# Altium PCB regbot_v3.PcbDoc
Units mm, origin at the board's own origin, x right, y up, seen from the top; angles counter-clockwise.
Board outline 97.79 x 97.79 mm, 2 copper layers (Top Layer, Bottom Layer); 64 components, 82 nets, 378 pads, 83 vias.
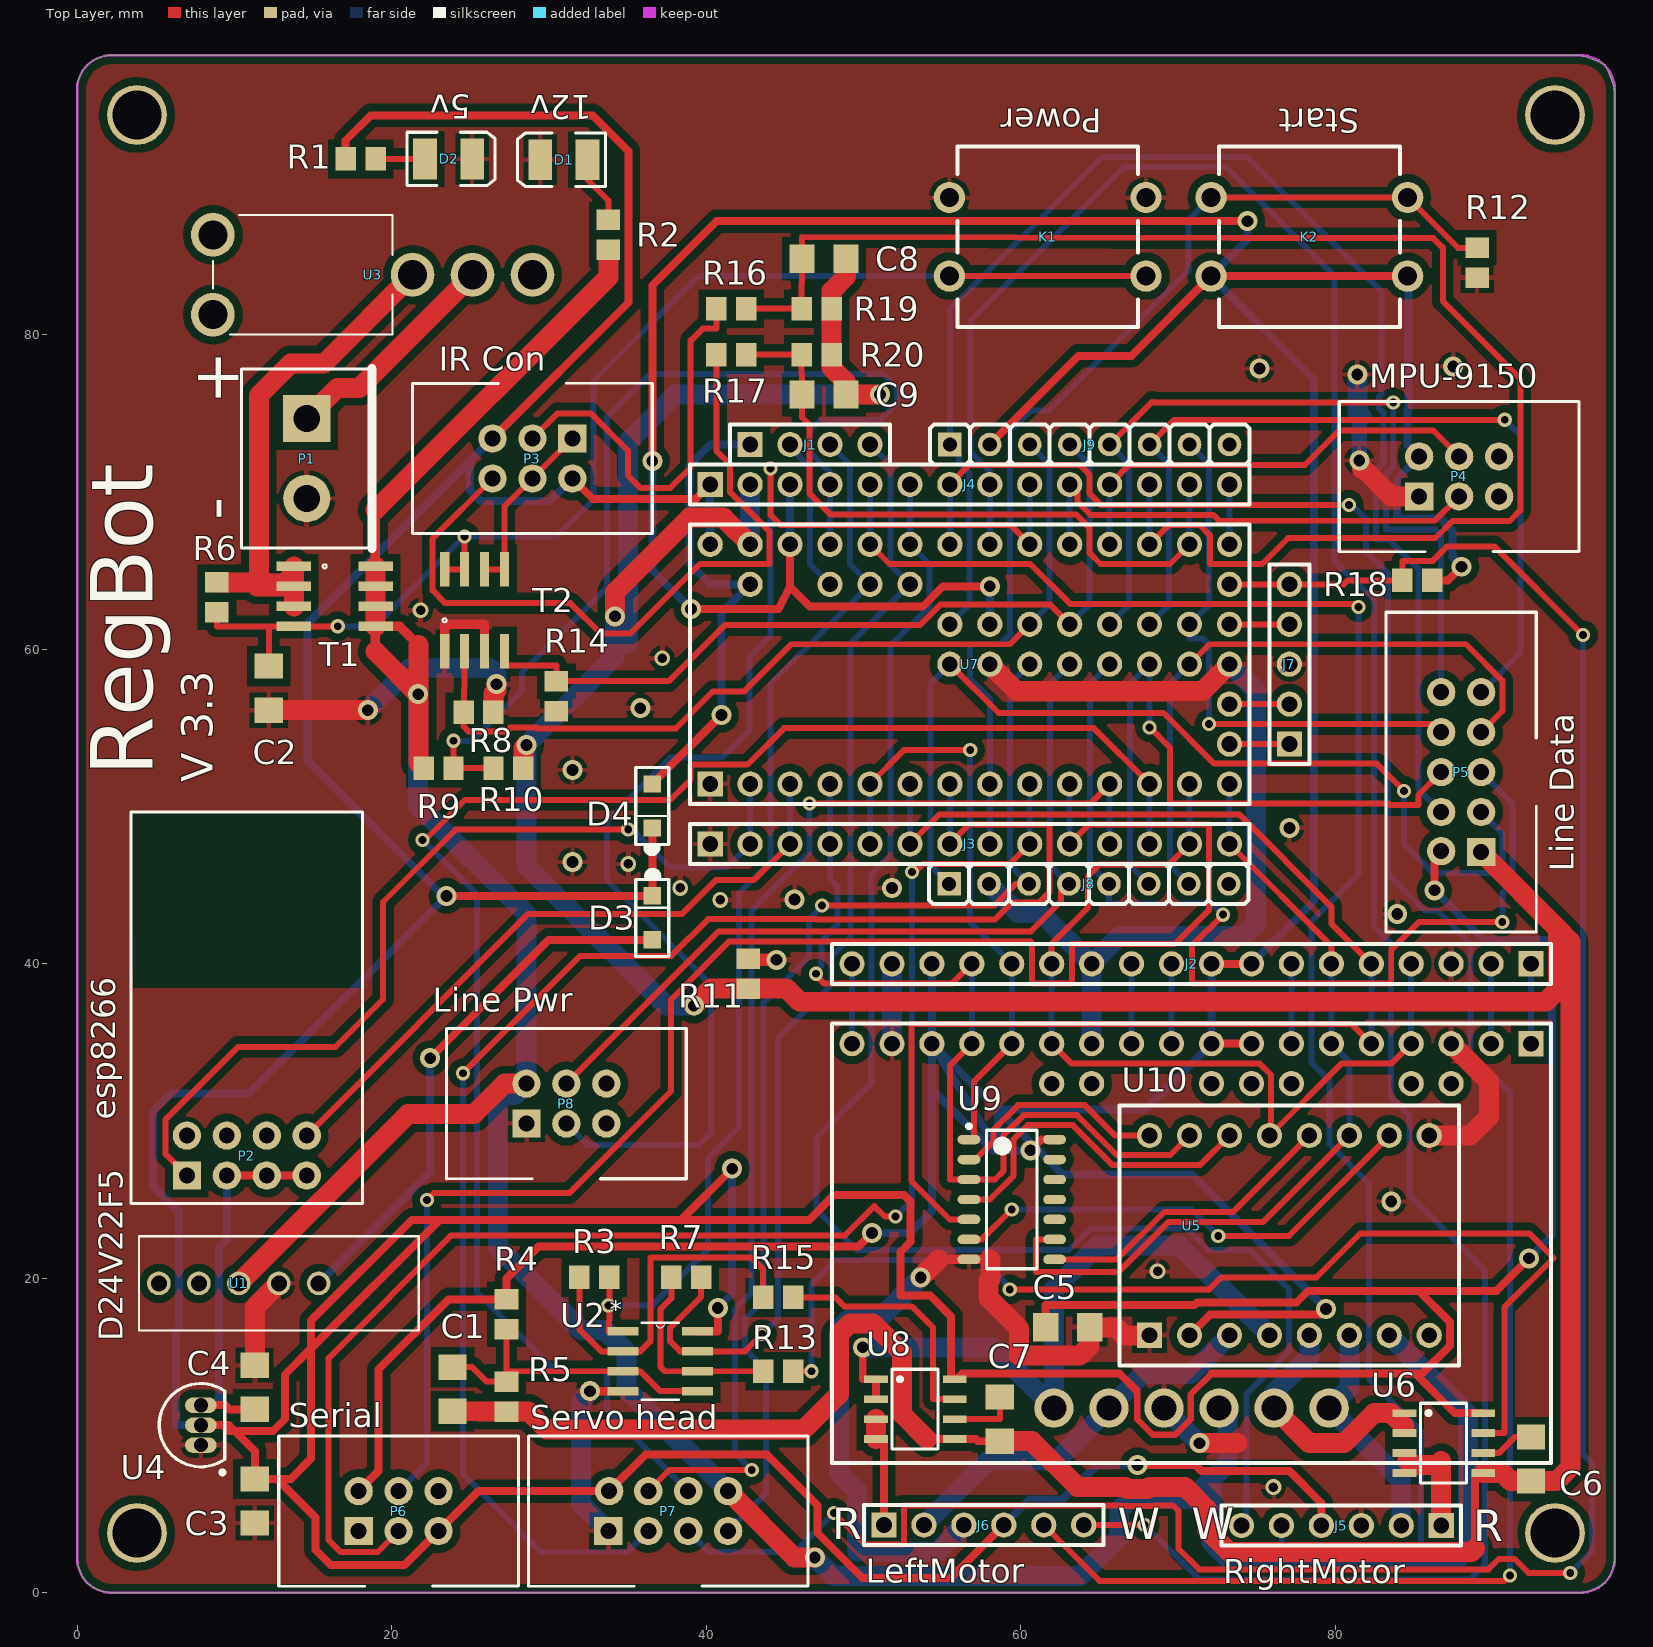
[diagram p0: Top Layer view]
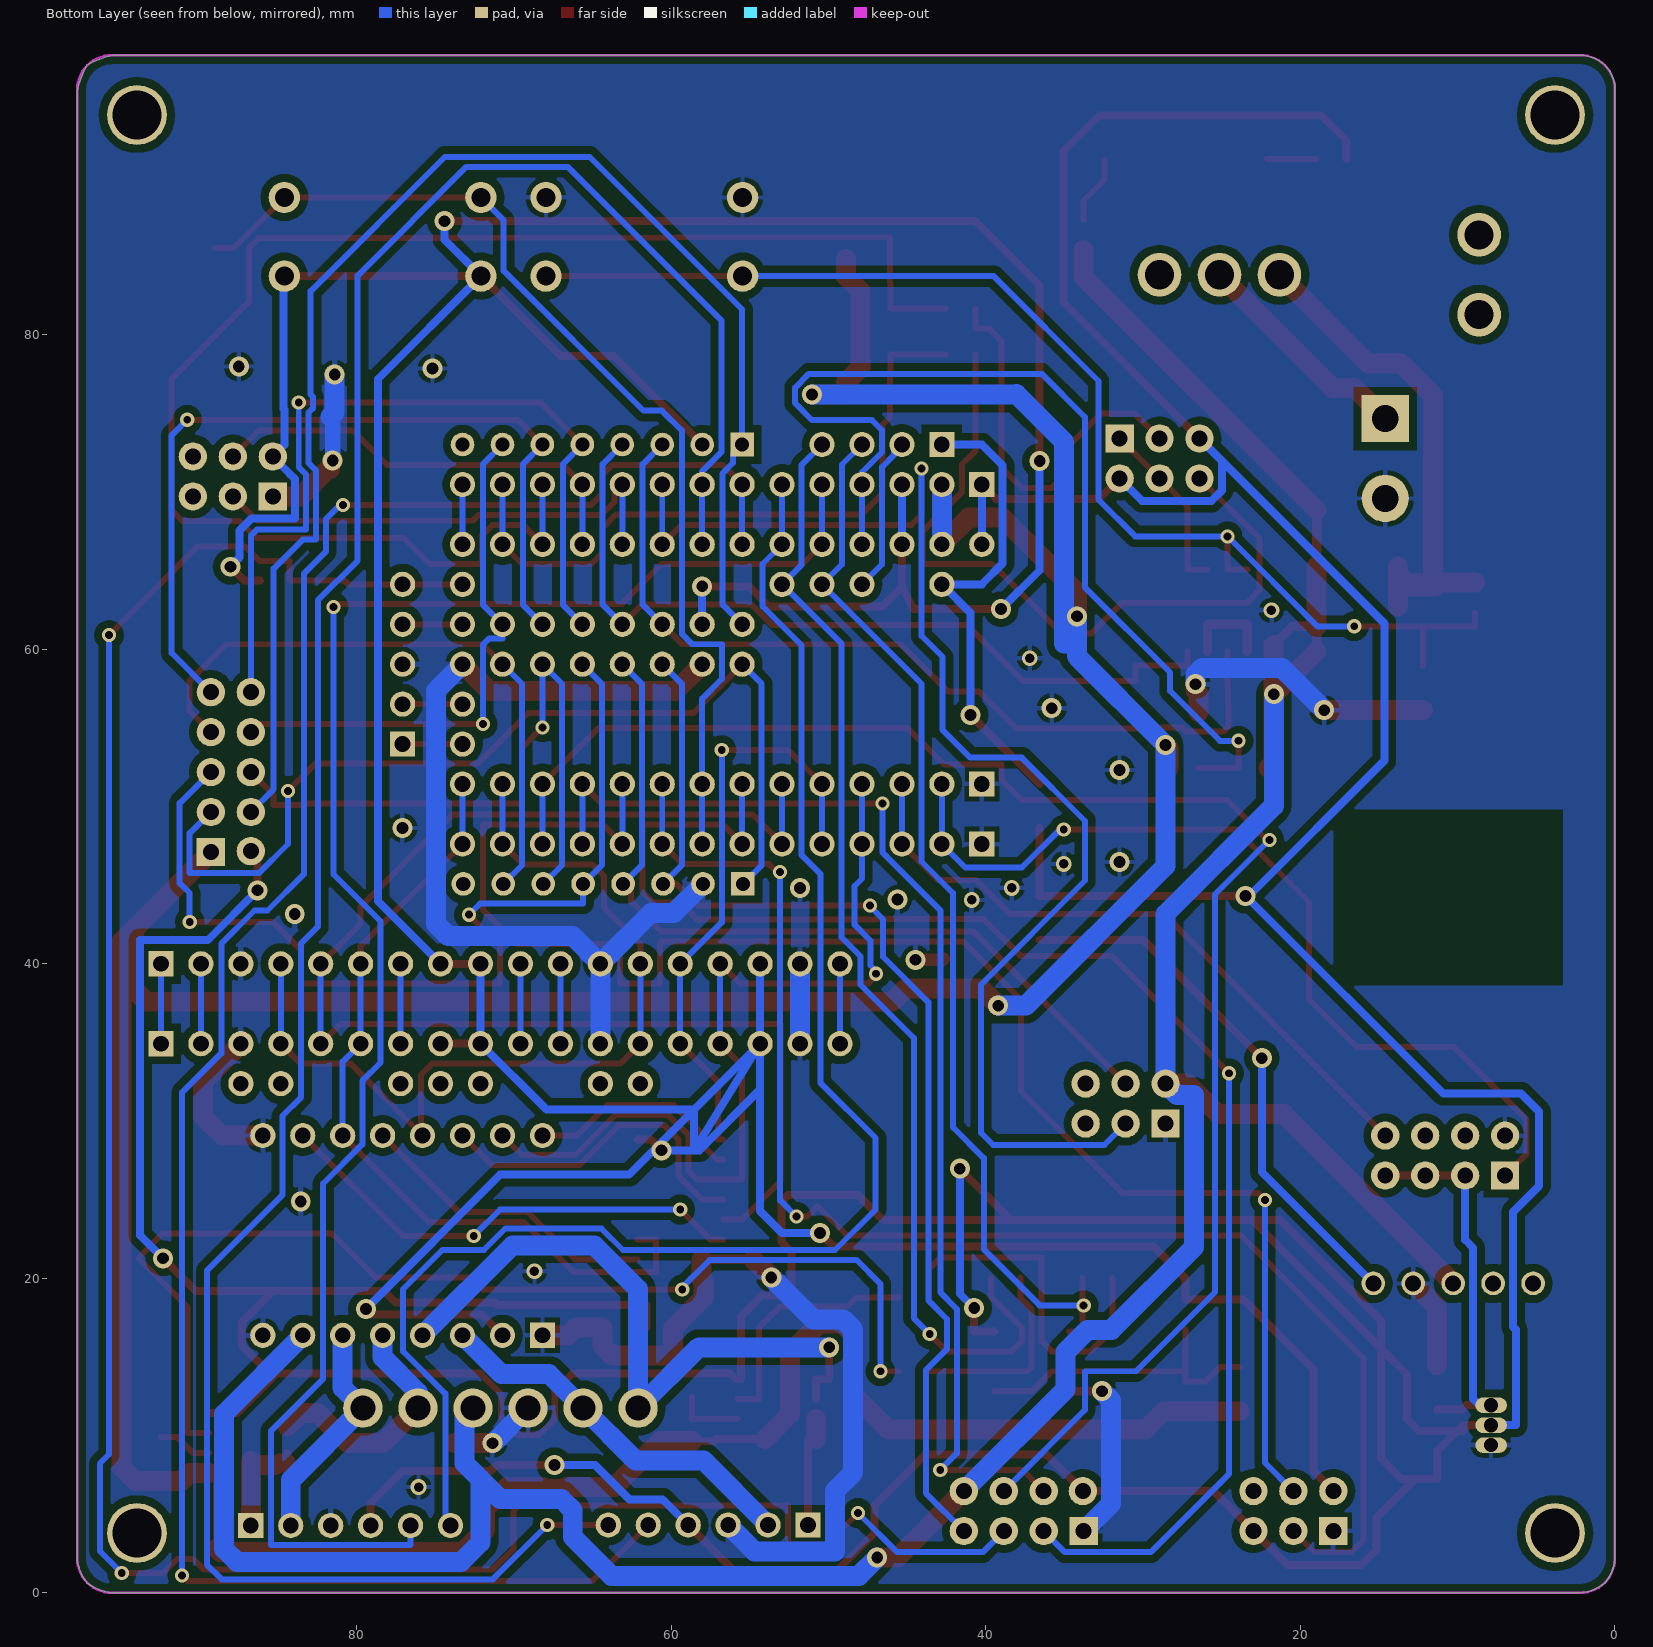
[diagram p1: Bottom Layer view, seen from below]

## Layer stack, top to bottom
Top Solder: solder mask 0.0102, Solder Resist, Dk 3.5
Top Layer: signal copper 0.0356
Dielectric1: dielectric 0.32, FR-4, Dk 4.8
Bottom Layer: signal copper 0.0356
Bottom Solder: solder mask 0.0102, Solder Resist, Dk 3.5

## Board outline
95.631,0 ccw(c94.922,3.913) 97.16,0.626 ccw(c94.403,2.654) 97.79,2.159 97.79,95.504 ccw(c91.471,94.051) 97.16,97.16 ccw(c93.874,91.006) 95.504,97.79 14.351,97.79 2.032,97.79 ccw(c2.672,94.348) 0.762,97.282 ccw(c2.22,95.601) 0,95.758 0,61.341 0,2.159 ccw(c2.979,2.481) 0.626,0.626 ccw(c2.545,3.2) 2.286,0

## Design rules (kind name [scope] priority, off if disabled: settings)
Clearance [All] p1: gap=0.254 except(0.5: Arc-Poly Track-Poly SMDPad-Poly THPad-Poly Via-Poly Fill-Poly Poly-Poly Poly-Region Poly-Text)
ComponentClearance ComponentClearance_motorController [HasFootprint('Pololu_Dual_MC33926') or HasFootprint('H01x14')] p1: gap=-5 collisioncheckmode=3 verticalgap=2540 showdistances=FALSE
ComponentClearance ComponentClearance_1 [All] p2: gap=0.254 collisioncheckmode=3 verticalgap=0.254 showdistances=FALSE
FabricationTestPointUsage TestPointUsage [All] p1: valid=0 allowmultiple=FALSE
FabricationTestpoint Testpoint [All] p1: side=3 testpointundercomponent=TRUE minsize=1.016 maxsize=2.54 preferedsize=1.524 minholesize=0 maxholesize=1.016 preferedholesize=0.813 testpointgrid=0.025 allowsidetop=TRUE allowsidebottom=TRUE usegrid=TRUE gridtolerance=0
HoleSize [All] p1: absolutevalues=TRUE maxlimit=4 minlimit=0.025 maxpercent=80.000 minpercent=20.000
MinimumSolderMaskSliver [HasFootprint('TO-92-TO3') vs HasFootprint('TO-92-TO3')] p1: minsoldermaskwidth=0.065
MinimumSolderMaskSliver MinimumSolderMaskSliver_1 [All] p2: minsoldermaskwidth=0.1
PolygonConnect [All] p1: connectstyle=Relief reliefconductorwidth=0.3 reliefentries=4 polygonreliefangle="90 Angle" airgapwidth=0.3
RoutingVias RoutingVias_power [(InNetClass('Power high') OR InNetClass('Power low'))] p1: holewidth=0.75 width=1.27 viastyle="Through Hole" minholewidth=0.6 minwidth=0.75 maxholewidth=1 maxwidth=2.54
RoutingVias [All] p2: holewidth=0.5 width=0.9 viastyle="Through Hole" minholewidth=0.3 minwidth=0.5 maxholewidth=0.711 maxwidth=1.27
SMDNeckDown [All] p1: percent=100.000
SilkToSilkClearance [All] p1: silktosilkclearance=0.1
SilkToSolderMaskClearance SilkscreenOverComponentPads [IsPad] p1: minsilkscreentomaskgap=0.1 clearancetoexposedcopper=TRUE
SolderMaskExpansion [All] p1: expansion=0.102
Width Width_pwr_high [InNetClass('Power high')] p1: maxlimit=2.54 minlimit=0.5 preferedwidth=1.27 minimp=50.000000 maximp=50.000000 favimp=50.000000
Width Width_pwr_low [InNetClass('Power low')] p2: maxlimit=1.016 minlimit=0.254 preferedwidth=0.508 minimp=50.000000 maximp=50.000000 favimp=50.000000
Width [All] p3: maxlimit=0.508 minlimit=0.254 preferedwidth=0.381 minimp=50.000000 maximp=50.000000 favimp=50.000000
23 further rules are at their usual default settings.

## Classes and differential pairs
net class "Power low": +3.3-WIFI +3.3V +5V NetD3_A VUSB
net class "Power high": AGND GND LEFTMOTOR+ LEFTMOTOR- LEFTMOTOROUT NetP1_1 NetR6_2 RIGHTMOTOR+ RIGHTMOTOR- RIGHTMOTOROUT VMOT

## Components (designator, comment, footprint, x,y, rotation, side; value= is the part's Value field where it differs from the comment)
C1 "1uF" C1206 23.876,12.954 r90 top
C2 "47uF, 25v" C1206 12.192,57.531 r270 top
C3 "1uF" C1206 11.303,5.845 r270 top
C4 "1uF" C1206 11.303,13.078 r90 top
C5 "1uF" C1206 62.992,16.891 r0 top
C6 "220nF" C1206 92.456,8.509 r270 top
C7 "220nF" C1206 58.674,11.049 r270 top
C8 "1nF" C1206 47.498,84.836 r0 top
C9 "1nF" C1206 47.498,76.2 r180 top
D1 "12v" 3.5X2.8X1.9 30.96,91.132 r180 top locked
D2 "5v" 3.5X2.8X1.9 23.622,91.186 r0 top
D3 "MPEG4020ER" SOD123W 36.576,42.926 r270 top
D4 "MPEG4020ER" SOD123W 36.576,50.038 r90 top
J1 "Teensy pin header top" H01x04 42.799,73.025 r90 top locked
J2 "Pololu pin header" H01x18 92.456,40.005 r270 top locked
J3 "Teensy pin header left" H01x14 40.259,47.625 r90 top locked
J4 "Teensy pin header right" H01x14 40.259,70.485 r90 top locked
J5 "RightMotor" H01x06 86.741,4.287 r270 top locked
J6 "LeftMotor" H01x06 51.308,4.318 r90 top
J7 "Teensy pin header end" H01x05 77.089,53.975 r180 top locked
J8 "Teensy pin header buttom left" H01x07 55.449,45.085 r90 top
J9 "Teensy pin header buttom right" H01x07 55.499,73.025 r90 top locked
K1 "Power" COM_10302 61.722,86.233 r0 top locked
K2 "Start" COM_10302 78.359,86.233 r0 top locked
P1 "Power" Rising_clamp_2 14.605,72.136 r270 top
P2 "esp8266" ESP8266 6.985,26.543 r90 top locked
P3 "IR Con" HOUSED6 31.496,73.406 r270 top locked
P4 "MPU-9150" HOUSED6 85.344,69.723 r90 top locked
P5 "Line Data" HOUSED10 89.281,47.117 r180 top locked
P6 "Serial" HOUSED6 17.907,3.937 r90 top
P7 "Servo head" HOUSED8 33.782,3.937 r90 top
P8 "Line Pwr" HOUSED6 28.575,29.845 r90 top
R1 "1k2" R0805 18.034,91.186 r180 top
R2 "4k7" R0805 33.782,86.36 r270 top
R3 "47K" R0805 32.893,20.066 r0 top
R4 "47k" R0805 27.305,17.714 r270 top
R5 "47k" R0805 27.305,12.481 r90 top
R6 "15K" R0805 8.89,63.307 r90 top
R7 "47K" R0805 38.735,20.066 r0 top
R8 "47K" R0805 25.527,56.007 r180 top
R9 "15k" R0805 22.987,52.451 r180 top
R10 "1k2" R0805 27.432,52.451 r180 top
R11 "0" R0805 42.672,39.37 r270 top
R12 "33k" R0805 89.027,84.582 r270 top
R13 "47k" R0805 44.577,14.097 r180 top
R14 "47K" R0805 30.48,57.023 r90 top
R15 "47k" R0805 44.577,18.796 r180 top
R16 "6k8" R0805 41.595,81.661 r0 top
R17 "6k8" R0805 41.595,78.74 r0 top
R18 "15k" R0805 85.217,64.389 r180 top
R19 "3k6" R0805 47.025,81.661 r0 top
R20 "3k6" R0805 47.025,78.74 r180 top
T1 "DMG4435" "SO8 - DMG4435" 16.383,63.373 r270 top
T2 "DMN2029" "SO8 - DMN2029" 25.273,62.484 r0 top
U1 "D24V22F5" D24V22Fx-vert 5.207,19.685 r0 top
U2 "MCP6242" SOIC127P600X175-8N 37.084,14.732 r0 top
U3 "SPDS Switch" RS-SPDS-ANGLE 21.336,83.82 r270 top
U4 "MCP1700" TO-92-TO3 7.874,10.668 r0 top
U5 "Pololu Dual MC33926" Pololu_Dual_MC33926 70.866,36.195 r270 top locked
U6 "ACS712" SOIC8 84.408,11.43 r0 top
U7 "TEENSY 3.1" TEENSY_3_1 40.259,51.435 r90 top locked
U8 "ACS712" SOIC8 50.8,13.589 r0 top
U9 "74LVT04" SO14 59.436,25.019 r0 top
U10 "TB6612FNG" Breakout16 77.089,22.733 r90 top

## Footprints (in the part's own frame and the unit in brackets; to place one, negate y for a bottom-side part, rotate by r counter-clockwise, add the part's x,y. Pads: shape width x height; smd on the part's side, far side on the other; paste and mask are expansions set on the pad)
3.5X2.8X1.9 [mm] "SM LED; 2 C-Bend Leads; Body 3.5 x 2.8 x 1.9 mm, inc leads (LxWxH typ)"
  rect 1.5x2.6 smd: 1(-1.5,0) 2(1.5,0)
  silkscreen extent -2.65,-1.7 2.95,1.7
Breakout16 [mm]
  rect 1.6x1.6 hole 1: 1(-6.35,8.89)
  round 1.6 hole 1: 1(-6.35,-8.89) 1(6.35,-8.89) 2(-6.35,6.35) 3(-6.35,3.81) 4(-6.35,1.27) 5(-6.35,-1.27) 6(-6.35,-3.81) 7(-6.35,-6.35) 10(6.35,-6.35) 11(6.35,-3.81) 12(6.35,-1.27) 13(6.35,1.27) 14(6.35,3.81) 15(6.35,6.35) 16(6.35,8.89)
  silkscreen extent -8.25,-10.79 8.25,10.79
C1206 [mm]
  rect 1.6x1.8 smd: 1(-1.4,0) 2(1.4,0)
COM_10302 [mm]
  round 2 hole 1.2: 1(-6.25,2.5) 1(6.25,2.5) 2(-6.25,-2.5) 2(6.25,-2.5)
  silkscreen extent -5.75,-5.75 5.75,5.75
D24V22Fx-vert [mm]
  round 1.5 hole 1.016: EN(2.54,0) GND(7.62,0) PG(0,0) Vin(5.08,0) Vout(10.16,0)
  silkscreen extent -1.27,-3 16.53,3
ESP8266 [mm]
  rect 1.8x1.8 hole 1: 1(0,0)
  round 1.8 hole 1: 2(0,-2.54) 3(0,-5.08) 4(0,-7.62) 5(2.54,-7.62) 6(2.54,-5.08) 7(2.54,-2.54) 8(2.54,0)
  silkscreen extent -1.78,-11.18 23.11,3.56
H01x04 [mm]
  rect 1.6x1.6 hole 1: 1(0,0)
  round 1.6 hole 1: 2(0,-2.54) 3(0,-5.08) 4(0,-7.62)
  silkscreen extent -1.27,-8.89 1.27,1.27
H01x05 [mm]
  rect 1.6x1.6 hole 1: 1(0,0)
  round 1.6 hole 1: 2(0,-2.54) 3(0,-5.08) 4(0,-7.62) 5(0,-10.16)
  silkscreen extent -1.27,-11.43 1.27,1.27
H01x06 [mm]
  rect 1.6x1.6 hole 1: 1(0,0)
  round 1.6 hole 1: 2(0,-2.54) 3(0,-5.08) 4(0,-7.62) 5(0,-10.16) 6(0,-12.7)
  silkscreen extent -1.27,-13.97 1.27,1.27
H01x07 [mm]
  rect 1.5x1.5 hole 0.9: 1(0,0)
  round 1.5 hole 0.9: 2(0,-2.54) 3(0,-5.08) 4(0,-7.62) 5(0,-10.16) 6(0,-12.7) 7(0,-15.24) 8(0,-17.78)
  silkscreen extent -1.27,-19.05 1.27,1.27
H01x14 [mm]
  rect 1.6x1.6 hole 1: 1(0,0)
  round 1.6 hole 1: 2(0,-2.54) 3(0,-5.08) 4(0,-7.62) 5(0,-10.16) 6(0,-12.7) 7(0,-15.24) 8(0,-17.78) 9(0,-20.32) 10(0,-22.86) 11(0,-25.4) 12(0,-27.94) 13(0,-30.48) 14(0,-33.02)
  silkscreen extent -1.27,-34.29 1.27,1.27
H01x18 [mm]
  rect 1.6x1.6 hole 1: 1(0,0)
  round 1.6 hole 1: 2(0,-2.54) 3(0,-5.08) 4(0,-7.62) 5(0,-10.16) 6(0,-12.7) 7(0,-15.24) 8(0,-17.78) 9(0,-20.32) 10(0,-22.86) 11(0,-25.4) 12(0,-27.94) 13(0,-30.48) 14(0,-33.02) 15(0,-35.56) 16(0,-38.1) 17(0,-40.64) 18(0,-43.18)
  silkscreen extent -1.27,-44.45 1.27,1.27
HOUSED6 [mm]
  rect 1.8x1.8 hole 1.02: 1(0,0)
  round 1.8 hole 1.02: 2(0,-2.54) 3(0,-5.08) 4(2.54,-5.08) 5(2.54,-2.54) 6(2.54,0)
  silkscreen extent -3.51,-10.16 6.05,5.08
HOUSED8 [mm]
  rect 1.8x1.8 hole 1.02: 1(0,0)
  round 1.8 hole 1.02: 2(0,-2.54) 3(0,-5.08) 4(0,-7.62) 5(2.54,-7.62) 6(2.54,-5.08) 7(2.54,-2.54) 8(2.54,-0.051)
  silkscreen extent -3.51,-12.7 6.05,5.08
HOUSED10 [mm]
  rect 1.8x1.8 hole 1.02: 1(0,0)
  round 1.8 hole 1.02: 2(0,-2.54) 3(0,-5.08) 4(0,-7.62) 5(0,-10.16) 6(2.54,-10.16) 7(2.54,-7.62) 8(2.54,-5.08) 9(2.54,-2.54) 10(2.54,-0.051)
  silkscreen extent -3.51,-15.24 6.05,5.08
Pololu_Dual_MC33926 [mm]
  rect 1.6x1.6 hole 1: 1(1.27,21.59)
  round 1.6 hole 1: 3(1.27,19.05) 5(1.27,16.51) 6(3.81,16.51) 7(1.27,13.97) 8(3.81,13.97) 9(1.27,11.43) 11(1.27,8.89) 13(1.27,6.35) 14(3.81,6.35) 15(1.27,3.81) 16(3.81,3.81) 17(1.27,1.27) 18(3.81,1.27) 19(1.27,-1.27) 21(1.27,-3.81) 23(1.27,-6.35) 24(3.81,-6.35) 25(1.27,-8.89) 26(3.81,-8.89) 27(1.27,-11.43) 29(1.27,-13.97) 31(1.27,-16.51) 33(1.27,-19.05) 35(1.27,-21.59)
  round 2.5 hole 1.6: 37(24.44,8.75) 38(24.44,5.25) 39(24.44,1.75) 40(24.44,-1.75) 41(24.44,-5.25) 42(24.44,-8.75)
  silkscreen extent 0,-22.86 27.94,22.86
R0805 [mm]
  rect 1.3x1.5 smd: 1(-0.95,0) 2(0.95,0)
Rising_clamp_2 [mm]
  rect 3x3 hole 1.7: 1(-2.54,0)
  round 3 hole 1.7: 2(2.54,0)
  silkscreen extent -5.7,-4.15 5.7,4.15
RS-SPDS-ANGLE [mm]
  round 2.775 hole 1.85: 0(-2.54,-12.7) 0(2.54,-12.7) 1(0,0) 2(0,3.81) 3(0,7.62)
  silkscreen extent -3.81,-12.7 3.81,-1.27
"SO8 - DMG4435" [mm] "Special pinout for the DMG4435"
  rect 0.6x2.2 smd: 1(-1.905,-2.6) 1(-0.635,-2.6) 1(0.635,-2.6) 2(1.905,-2.6) 3(-1.905,2.6) 3(-0.635,2.6) 3(0.635,2.6) 3(1.905,2.6)
  silkscreen extent -2.03,-0.76 -1.78,-0.51
"SO8 - DMN2029" [mm] "Special pinout for the DMN2029"
  rect 0.6x2.2 smd: 1(-1.905,-2.6) 2(-0.635,-2.6) 3(0.635,-2.6) 4(1.905,-2.6) 5(0.635,2.6) 5(1.905,2.6) 7(-1.905,2.6) 7(-0.635,2.6)
  silkscreen extent -2.03,-0.76 -1.78,-0.51
SO14 [mm] "SOIC, 14-Leads, Body 8,65x3,90mm, Pitch 1,27mm, IPC Medium Density"
  oval 1.45x0.6 smd: 1(-2.725,3.81) 2(-2.725,2.54) 3(-2.725,1.27) 4(-2.725,0) 5(-2.725,-1.27) 6(-2.725,-2.54) 7(-2.725,-3.81) 8(2.725,-3.81) 9(2.725,-2.54) 10(2.725,-1.27) 11(2.725,0) 12(2.725,1.27) 13(2.725,2.54) 14(2.725,3.81)
  silkscreen extent -2.85,-4.4 1.6,4.78, body extent -2,-4.4 2,4.4, height 1.75
SOD123W [mm]
  rect 1.1x1.1 smd: A(1.4,0) C(-1.4,0)
  silkscreen extent -2.89,-1.05 2.45,1.05
SOIC8 [mm]
  rect 1.5x0.5 smd: 1(0,0) 2(0,-1.27) 3(0,-2.54) 4(0,-3.81) 5(5,-3.81) 6(5,-2.54) 7(5,-1.27) 8(5,0)
  silkscreen extent 1.02,-4.44 3.94,0.64
SOIC127P600X175-8N [mil]
  rect 78x22 smd: 1(-93,75) 2(-93,25) 3(-93,-25) 4(-93,-75) 5(93,-75) 6(93,-25) 7(93,25) 8(93,75)
  silkscreen extent -46,-96 46,96
TEENSY_3_1 [mm]
  rect 1.6x1.6 hole 1: 1(0,0)
  round 1.6 hole 1: 2(0,-2.54) 3(0,-5.08) 4(0,-7.62) 5(0,-10.16) 6(0,-12.7) 7(0,-15.24) 8(0,-17.78) 9(0,-20.32) 10(0,-22.86) 11(0,-25.4) 12(0,-27.94) 13(0,-30.48) 14(0,-33.02) 15(2.54,-33.02) 16(5.08,-33.02) 17(7.62,-33.02) 18(10.16,-33.02) 19(12.7,-33.02) 20(15.24,-33.02) 21(15.24,-30.48) 22(15.24,-27.94) 23(15.24,-25.4) 24(15.24,-22.86) 25(15.24,-20.32) 26(15.24,-17.78) 27(15.24,-15.24) 28(15.24,-12.7) 29(15.24,-10.16) 30(15.24,-7.62) 31(15.24,-5.08) 32(15.24,-2.54) 33(15.24,0) 34(12.7,-2.54) 35(12.7,-7.62) 36(12.7,-10.16) 37(12.7,-12.7) 38(7.62,-15.24) 39(7.62,-17.78) 40(7.62,-20.32) 41(7.62,-22.86) 42(7.62,-25.4) 43(7.62,-27.94) 44(7.62,-30.48) 45(10.16,-30.48) 46(10.16,-27.94) 47(10.16,-25.4) 48(10.16,-22.86) 49(10.16,-20.32) 50(10.16,-17.78) 51(10.16,-15.24)
  silkscreen extent -1.27,-34.29 16.51,1.27
TO-92-TO3 [mm] "TO, Flat Index; 3 In-Line, Axial Leads; Body Dia. 4.8mm; Leads 0.56 x 0.53 mm (max)"
  oval 2x1 hole 0.9: 1(0,-1.27) 2(0,0) 3(0,1.27)
  silkscreen extent -2.65,-3.13 1.52,2.65, body extent -2.66,-2.66 1.52,2.66, height 5.33

## Part data
C1 C2 C3 C4 C5 C6 C7 C8 C9: library part C-EU, "CAPACITOR, European symbol"
D1 D2: library part LED3, "Red LED"
J1: library part H01x04
J2: library part H01x18
J3 J4: library part H01x14
J5 J6: library part H01x06
J7: library part H01x05
J8 J9: library part H01x07
K1 K2: library part COM-10302
P1: library part SCREW_CON_2X
P3 P4 P6 P8: library part PIN_HOUSED_6
P5: library part PIN_HOUSED_10
P7: library part PIN_HOUSED_8
R1 R2 R3 R4 R5 R6 R7 R8 R9 R10 R11 R12 R13 R14 R15 R16 R17 R18 R19 R20: library part R-EU, "RESISTOR, European symbol"
T1: library part DMG4435SSS, "P-Channel Enhancement MOSFET PNP"
T2: "Dual MOSFET NPN"
U1: library part D24V22Fx, "Pololu xV, 2.5A Step-Down Voltage Regulator"
U2: "MCP6242-E/SN"
U3: library part SPDS-ANGLE
U4: library part MCP1700-3302E/TO, "Low Quiescent Current LDO, 3-Pin TO-92, Extended TemperatureBAG"
U6 U8: library part ACS712ELCTR-05B-T, "ACS712ELCTR-05B-T"
U9: "Hex inverter"
U10: library part TB6612FNG_pololu, "Polulu #713 carrier board"

## Free pads (board coordinates)
  round 3.81 hole 3.1: 0(3.81,3.81) 1(3.81,93.98) 2(93.98,93.98) 3(93.98,3.81)

## Via types
v1: diameter 1.27, hole 0.75, Top Layer to Bottom Layer, 41 vias
v2: diameter 0.9, hole 0.5, Top Layer to Bottom Layer, 35 vias
v3: diameter 1, hole 0.6, Top Layer to Bottom Layer, 7 vias

## Nets (pads, with @x,y where several pads share a name; then routed paths per layer and width w, separated by ;. In a path a pad name is that pad's centre, name@x,y a point inside that pad or via, vN(x,y) a via of type N, cw(c..) or ccw(c..) an arc to the next point about the centre after c; other vN are vias at no path point)
+3.3-WIFI: C4.1 P2.2 P2.3 P2.4 U4.3 | length 24.3
  Top Layer w0.508: U4.3 9.449,11.938 9.709,11.678 C4.1 ; P2.2 P2.3 P2.4
  Bottom Layer w0.508: U4.3 8.611,11.938 9.017,12.344 9.017,21.946 9.525,22.454 P2.2
+3.3V: J2.8 J2.9 J2.16 J4.3 J9.2 K2.2 P4.6 P6.6 R4.1 R18.1 U5.15 U5.17 U5.31 U7.31 U7.50 U9.14 U10.2 | length 350.8
  Top Layer w0.508: P6.6 19.177,7.747 19.177,14.224 23.617,18.664 R4.1 27.305,19.99 29.35,22.034 49.695,22.034 v1(50.546,22.885) ; v1(36.576,71.984) 36.576,83.134 40.665,87.224 v1(74.422,87.224) ; v1(39.04,62.56) 44.602,62.56 45.339,63.983 ; U7.31 45.339,63.983 ; v1(58.039,64.008) 55.07,64.008 53.775,62.713 46.609,62.713 45.339,63.983 ; J9.2 63.678,78.664 67.04,78.664 72.109,83.733 K2.2@84.609,83.733 ; v1(60.63,28.143) 61.316,28.829 U9.14 ; U10.2 72.047,17.691 79.057,17.691 v1(79.426,18.059) ; U5.17 U5.15 ; J2.9 J2.8 ; R18.1 87.173,64.389 v1(88.036,65.253)
  Bottom Layer w0.508: v1(36.576,71.984) 36.576,65.024 v1(39.04,62.56) ; U7.31 J4.3 ; v1(50.546,22.885) 52.959,22.885 54.356,24.282 54.356,32.004 ; J2.16 U5.31 ; U7.50 v1(58.039,64.008) ; v1(60.63,28.143) 58.547,28.143 ; J2.9 U5.17 67.945,30.734 58.547,30.734 ; v1(74.422,87.224) 74.422,86.046 72.109,83.733 78.664,77.178 78.664,43.993 J2.8 ; v1(79.426,18.059) 70.891,26.594 62.687,26.594 58.547,30.734 ; K2.2@84.609,83.733 84.651,83.691 84.651,75.295 84.609,75.253 84.609,72.998 P4.6 85.344,72.241 84.264,71.162 84.264,71.131 84.234,71.131 83.936,70.833 83.936,69.321 83.936,68.315 86.701,68.315 87.452,67.564 87.452,65.837 v1(88.036,65.253) ; 54.356,32.004 U5.31 ; 54.356,32.004 58.217,28.143 58.547,28.143 ; U5.31 58.547,28.143 ; U5.31 58.547,30.734 ; 58.547,28.143 58.547,30.734
+5V: C3.1 C5.1 D3.C D4.C J4.1 J5.4 J6.4 P3.3 P3.6 P5.10 P6.3 P7.8 R1.2 U2.8 U4.2 U6.8 U7.33 U8.8 | length 474.7
  Top Layer w0.4: 67.366,12.873 67.412,12.827 67.412,11.049 68.41,10.051 69.822,10.051 70.82,11.049 70.82,12.629 72.136,13.945
  Top Layer w0.5: 55.575,17.577 55.575,13.589 U8.8 55.905,13.589 56.261,13.945 66.294,13.945 67.366,12.873 ; 72.136,13.945 84.963,13.945 ; 85.09,13.945 85.522,13.945
  Top Layer w0.508: U4.2 9.296,10.668 ; R1.2 17.084,92.37 18.669,93.955 32.791,93.955 35.052,91.694 35.052,82.042 P3.3 ; v1(23.492,44.326) D3.C D4.C ; P3.6 32.792,69.57 39.344,69.57 J4.1 ; U2.8 40.742,16.637 v1(40.742,18.11) ; v1(41.656,26.975) 38.405,23.724 ; 55.575,17.577 54.229,18.923 52.375,18.923 52.375,21.699 53.003,22.327 53.003,24.885 52.589,25.298 48.133,25.298 46.558,23.724 38.405,23.724 ; J6.4 55.575,0.965 49.935,0.965 47.098,3.802 47.098,5.556 43.866,8.788 36.144,8.788 P7.8 25.527,6.477 P6.3 20.828,1.778 16.129,1.778 15.165,2.742 15.165,4.799 12.719,7.245 ; C5.1 61.592,18.314 71.07,18.314 71.209,18.453 77.527,18.453 78.289,19.215 85.306,19.215 ; v1(67.437,8.128) 71.12,8.128 71.501,7.747 77.089,7.747 79.121,5.715 J5.4 ; 84.963,13.945 85.09,13.945 87.605,11.43 U6.8 ; 85.522,13.945 87.3,15.723 87.3,17.221 85.306,19.215 ; v1(86.309,44.679) 86.309,46.736 P5.10 ; v1(92.324,21.28) 90.259,19.215 85.306,19.215 ; 9.296,10.668 9.652,10.668 10.008,10.312 ; 9.296,10.668 9.652,10.312 10.008,10.312 ; 10.008,10.312 11.303,9.017 C3.1 12.719,7.245 ; 10.008,10.312 12.471,10.312 13.208,11.049 13.208,13.868 14.884,15.545 ; 12.719,7.245 13.589,7.245 14.884,8.54 14.884,15.545 ; 14.884,15.545 23.063,23.724 ; 14.884,15.545 14.884,17.323 21.285,23.724 23.063,23.724 ; 23.063,23.724 38.405,23.724
  Bottom Layer w0.508: U4.2 6.299,10.668 6.299,16.739 6.477,16.916 6.477,24.232 4.826,25.883 4.826,30.607 5.969,31.75 10.916,31.75 v1@23.375,44.209 ; v1(23.492,44.326) v1@23.375,44.209 ; P3.3 24.994,71.984 ; P3.6 30.074,69.444 25.654,69.444 24.994,70.104 24.994,71.984 ; U7.33 J4.1 ; v1(40.742,18.11) 41.656,19.025 v1(41.656,26.975) ; J6.4 60.554,5.944 62.662,5.944 64.846,8.128 v1(67.437,8.128) ; v1(86.309,44.679) 89.484,41.504 93.777,41.504 93.777,22.733 v1(92.324,21.28) ; v1@23.375,44.209 14.656,52.928 14.656,61.646 24.994,71.984
A1: J7.5 P7.3 R18.2 U7.19 | length 151.8
  Top Layer w0.381: v2(48.133,5.08) 50.14,3.073 52.578,3.073 52.578,5.563 66.32,5.563 66.359,5.524 68.515,5.524 68.554,5.563 69.698,5.563 70.053,5.207 70.053,2.794 71.349,1.499 89.742,1.499 90.403,2.159 91.415,2.159 92.304,1.27 v2(94.945,1.27) ; U7.19 J7.5 80.543,64.135 80.797,64.389 R18.2 84.267,65.608 86.178,65.608 87.122,66.553 90.115,66.553 v2(95.758,60.909)
  Bottom Layer w0.381: P7.3 40.208,2.591 45.644,2.591 v2(48.133,5.08) ; v2(94.945,1.27) 96.342,2.667 96.342,8.23 95.758,8.814 v2(95.758,60.909)
A12: J8.1 P5.2 U7.38 | length 62
  Top Layer w0.381: U7.38 58.598,55.956 69.088,55.956 72.314,52.73 82.652,52.73 v2(84.379,51.003)
  Bottom Layer w0.381: J8.1 54.254,46.28 54.254,57.81 U7.38 ; v2(84.379,51.003) 84.379,47.625 86.233,45.771 90.626,45.771 90.626,48.312 P5.2
A13: J9.1 P5.9 U7.51 | length 91.7
  Bottom Layer w0.381: U7.51 56.744,62.84 56.744,71.195 56.088,71.851 56.088,72.436 J9.1 55.499,81.61 65.202,91.313 74.397,91.313 82.931,82.779 82.931,76.195 82.798,76.063 82.798,75.321 83.058,75.062 83.058,71.841 82.602,71.386 82.602,71.093 82.602,66.981 83.439,66.981 85.285,65.135 85.285,51.113 P5.9
A15: J8.5 P5.3 U7.42 | length 62.2
  Top Layer w0.381: v2(72.873,43.129) 70.891,41.148 70.891,38.761 83.541,38.761 83.566,38.786 83.566,40.894 85.344,42.672 v2(90.627,42.672)
  Bottom Layer w0.381: U7.42 64.414,57.81 64.414,46.28 J8.5 65.609,43.84 72.161,43.84 v2(72.873,43.129) ; P5.3 91.261,50.217 91.261,45.137 90.627,44.504 v2(90.627,42.672)
A16: J8.6 P5.8 U7.43 | length 42.9
  Top Layer w0.381: v2(68.199,55.042) 69.494,53.746 69.494,50.19 83.397,50.19 83.496,50.091 85.285,50.091 85.285,50.741 P5.8
  Bottom Layer w0.381: J8.6 66.954,46.28 66.954,57.81 U7.43 v2(68.199,55.042)
A17: J8.7 P5.4 U7.44 | length 40.2
  Top Layer w0.381: U7.44 72.009,60.325 88.316,60.325 90.627,58.014 90.627,56.083 P5.4
  Bottom Layer w0.381: J8.7 69.494,46.28 69.494,57.81 U7.44
A18: J9.7 P5.7 U7.45 | length 34.8
  Top Layer w0.381: v2(71.984,55.245) 86.233,55.245 P5.7
  Bottom Layer w0.381: J9.7 71.984,71.78 71.984,62.84 U7.45 70.739,60.681 71.603,60.681 71.984,60.3 v2(71.984,55.245)
A19: J9.6 P5.5 U7.46 | length 54.5
  Top Layer w0.381: J9.6 69.774,74.6 v2(90.78,74.6)
  Bottom Layer w0.381: U7.46 69.444,62.84 69.444,71.78 J9.6 ; P5.5 91.77,59.766 91.77,73.609 v2(90.78,74.6)
A20: J9.5 P5.6 U7.47 | length 53.5
  Top Layer w0.381: J9.5 68.377,75.743 68.428,75.692 v2(83.693,75.692)
  Bottom Layer w0.381: U7.47 66.904,62.84 66.904,71.78 J9.5 ; v2(83.693,75.692) 83.693,71.578 83.237,71.123 83.237,69.61 83.237,67.616 86.357,67.616 86.741,67.232 P5.6
AGND: C1.1 C6.2 C7.2 C8.2 C9.1 J4.2 P5.1 R5.1 R10.1 R11.2 R19.2 R20.1 U6.5 U7.32 U8.5 | length 285.9
  Top Layer w0.5: 54.051,9.779 U8.5 57.15,9.779 57.28,9.649 C7.2 ; 88.9,2.819 88.9,7.62 U6.5
  Top Layer w1.27: C1.1 25.578,11.554 25.601,11.531 R5.1 28.702,11.531 29.844,10.389 46.202,10.389 48.438,12.624 48.438,16.434 49.149,17.145 50.597,17.145 52.451,15.291 52.451,11.379 54.051,9.779 ; R10.1 28.382,53.731 v1(28.575,53.924) ; v1(34.214,62.103) 34.214,63.652 38.938,68.377 41.097,68.377 U7.32 ; v1(39.218,37.341) 40.297,38.42 R11.2 45.125,38.42 45.953,37.592 93.396,37.592 94.158,38.354 94.158,42.24 ; C8.2 48.898,83.702 47.975,82.779 R19.2 R20.1 47.975,77.911 48.898,76.987 C9.1 v1(51.054,76.2) ; C7.2 60.709,9.649 63.627,6.731 66.679,6.731 66.806,6.604 68.068,6.604 68.195,6.731 70.46,6.731 71.857,5.334 71.857,4.013 73.279,2.591 88.671,2.591 88.9,2.819 ; P5.1 94.158,42.24 ; U6.5 90.653,7.62 91.164,7.109 C6.2 94.079,7.109 94.971,8.001 94.971,41.427 94.158,42.24
  Bottom Layer w1.27: v1(34.214,62.103) 34.214,60.379 ; v1(39.218,37.341) 37.462,37.341 28.575,46.228 v1(28.575,53.924) 34.214,59.563 34.214,60.379 ; U7.32 J4.2 ; v1(51.054,76.2) 38.08,76.2 38.055,76.225 35.03,73.2 35.03,60.379 34.214,60.379
CLK: J4.14 U7.20 | length 3.8
  Bottom Layer w0.381: U7.20 J4.14
D1: J8.3 P7.4 U7.40 | length 72
  Top Layer w0.381: v2(47.371,43.706) 58.344,43.706 ; 58.344,43.739 59.69,45.085 J8.3
  Bottom Layer w0.381: P7.4 43.815,6.35 43.815,14.162 42.479,15.498 42.479,17.42 43.663,18.604 43.663,37.567 46.533,40.437 46.533,42.824 47.371,43.663 v2(47.371,43.706) ; J8.3 59.334,46.28 59.334,57.81 U7.40
DISABLE2: J2.4 J2.13 J3.13 U5.7 U5.25 U7.13 U10.13 | length 58
  Top Layer w0.381: U5.25 63.221,33.68 75.184,33.68 75.921,32.944 U10.13@75.921,29.185 ; J2.13 61.976,41.273 64.287,43.584 64.287,45.593 65.024,46.33 69.444,46.33 J3.13 ; U5.7 83.566,33.655 80.391,33.655 U10.13@75.921,29.185 ; U10.13@75.921,29.185 U10.13 75.921,29.083 U10.13@75.921,29.185
  Bottom Layer w0.381: U5.25 J2.13 ; J3.13 U7.13 ; U5.7 J2.4
DIST1: C8.1 J4.12 R16.2 R19.1 U7.22 | length 99.3
  Top Layer w0.381: R16.2 R19.1 46.075,83.236 46.098,83.259 C8.1 46.098,86.233 73.432,86.142 86.247,86.142 86.843,85.547 86.843,82.144 91.77,77.216 91.77,68.834 91.084,68.148 87.448,68.148 86.381,67.081 77.013,67.081 75.362,65.43 72.034,65.43 72.034,67.259 71.374,67.919 69.443,67.919 U7.22
  Bottom Layer w0.381: U7.22 J4.12
DIST2: C9.2 J4.13 R17.2 R20.2 U7.21 | length 43.8
  Top Layer w0.381: R17.2 R20.2 46.075,77.468 46.098,77.445 C9.2 46.098,74.755 46.584,74.27 46.584,69.901 47.904,68.58 63.516,68.58 64.364,67.733 64.364,66.142 65.075,65.431 69.495,65.431 U7.21
  Bottom Layer w0.381: U7.21 J4.13
GND: C2.2 C3.2 C4.2 C5.2 D1.2 D2.2 J2.3 J2.12 J2.17 J3.1 J5.3 J6.3 J7.3 J8.2 K1.1 P1.2 P2.8 P4.1 P6.1 P7.1 P8.1 R8.1 R11.1 R12.2 R14.1 T2.1 T2.3 U1.GND U2.4 U4.1 U5.5 U5.23 U5.33 U5.40 U7.1 U7.17 U7.39 U9.7 U10.1 | length 184.2
  Top Layer w0.559: v1(32.614,12.827) U2.4
  Top Layer w0.6: T2.1 23.368,61.595 25.908,61.595 T2.3 ; 54.788,21.209 U9.7 58.039,21.209
  Top Layer w0.8: R11.1 42.767,40.225 42.801,40.259 v1(44.473,40.259) ; 73.787,9.525 73.914,9.398
  Top Layer w1.27: C4.2 11.303,18.161 U1.GND ; C2.2 v1(18.488,56.131) ; R8.1 26.477,57.186 26.67,57.379 v1(26.67,57.785) ; v1(53.645,20.066) 54.788,21.209 ; 58.039,21.209 58.071,21.177 58.071,19.96 57.97,19.859 57.97,18.749 59.893,16.826 59.893,15.088 63.754,15.088 64.392,15.726 C5.2 66.04,16.891 66.548,16.383 U10.1@68.199,16.383 ; U7.39 59.741,57.353 71.577,57.353 U7.17 ; v1(71.374,9.525) 73.787,9.525 ; v1@81.7,71.462 81.827,71.462 83.566,69.723 P4.1 ; U10.1@85.979,29.083 88.57,29.083 89.789,30.302 89.789,32.512 U5.5
  Bottom Layer w1: v1(81.534,72.009) 81.534,74.676 81.661,74.803
  Bottom Layer w1.27: v1(18.488,56.131) 21.184,58.826 26.238,58.826 26.67,58.395 v1(26.67,57.785) ; v1(32.614,12.827) 32.029,12.243 32.029,5.69 P7.1 ; U5.33 J2.17 ; v1(53.645,20.066) 50.978,17.399 49.073,17.399 48.438,16.764 48.438,7.645 49.606,6.477 49.606,2.629 54.699,2.629 J6.3 ; J8.2 59.843,43.231 61.29,43.231 J2.12 ; U5.23 J2.12 ; U5.40 71.346,9.525 v1(71.374,9.525) ; U7.17 74.981,57.353 74.981,42.546 74.217,41.782 66.293,41.782 J2.12 ; v1(81.407,77.47) 81.407,75.057 81.661,74.803
  other v1: 83.566,24.892 83.947,43.18 45.616,44.092 51.816,44.831 31.496,46.482 77.089,48.641 31.496,52.324 35.814,56.261 75.184,77.851 87.503,77.978
  other v3: 76.073,6.731 68.707,20.447 40.894,44.069 38.354,44.831 35.052,46.355 37.211,59.436 21.844,62.484
LED: J4.9 P8.2 U7.25 | length 85.3
  Top Layer w0.381: v2(44.094,71.501) 44.094,68.555 44.729,67.92 59.334,67.92 U7.25
  Bottom Layer w0.381: P8.2 32.461,28.499 39.548,28.499 40.31,29.261 40.31,38.684 33.695,45.299 33.695,49.088 37.719,53.111 40.996,53.111 42.748,54.864 42.748,59.512 44.094,60.858 v2(44.094,71.501) ; U7.25 J4.9
LEDHIGH: J8.4 P8.5 U7.41 | length 52.6
  Top Layer w0.381: P8.5 40.794,42.064 60.657,42.064 62.566,43.972 62.566,44.582 J8.4
  Bottom Layer w0.381: J8.4 61.874,46.28 61.874,57.81 U7.41
LEFTDIR: J2.15 J3.4 U5.29 U7.4 U9.3 U10.15 | length 57.7
  Top Layer w0.381: v2(46.99,39.37) 46.99,39.243 47.472,38.761 55.652,38.761 J2.15 ; U5.29 55.499,33.528 55.499,26.289 U9.3 58.369,26.289 58.903,26.822 58.903,29.092 60.189,30.378 63.585,30.378 66.125,27.839 69.495,27.839 U10.15
  Bottom Layer w0.381: v2(46.99,39.37) 46.99,39.548 47.338,39.896 47.338,41.471 48.348,42.481 48.348,44.952 47.879,45.421 J3.4 U7.4 ; U5.29 J2.15
LEFTENCA: J4.7 J6.5 U7.27 | length 135.6
  Top Layer w0.381: J4.7 56.744,71.73 63.754,71.73 64.389,71.095 64.389,69.901 65.1,69.189 v2(80.873,69.189) ; J6.5 65.018,0.768 90.76,0.768 v2(91.11,1.118)
  Bottom Layer w0.381: U7.27 J4.7 ; v2@80.962,69.278 81.967,68.274 81.967,66.207 83.364,64.81 83.364,45.706 85.679,43.392 86.504,43.392 88.621,41.275 88.621,34.315 91.11,31.826 v2(91.11,1.118)
LEFTENCB: J4.8 J6.6 U7.26 | length 158.1
  Top Layer w0.381: J6.6 v2(67.894,4.318)
  Bottom Layer w0.381: U7.26 J4.8 58.039,71.323 56.82,72.542 56.82,80.922 66.576,90.678 73.041,90.678 79.954,83.765 79.954,65.636 82.474,63.116 82.474,42.367 83.541,41.3 83.541,31.521 84.734,30.328 84.734,25.298 89.535,20.498 89.535,1.803 88.595,0.864 71.349,0.864 v2(67.894,4.318)
LEFTFB: J2.10 U5.19 | length 5.1
  Bottom Layer w0.381: U5.19 J2.10
LEFTMOTCURR: J1.3 R3.2 U2.1 U7.36 | length 68.7
  Top Layer w0.381: v2(33.782,18.288) v2@33.843,18.288 ; R3.2 v2@33.843,18.288 ; U2.1 33.782,16.637 33.787,16.702 33.843,17.516 v2@33.843,18.288
  Bottom Layer w0.381: v2(33.782,18.288) 36.576,18.288 40.132,21.844 40.132,27.646 42.088,29.602 42.088,44.501 44.094,46.507 44.094,57.81 U7.36 49.149,65.405 49.149,71.755 J1.3
LEFTMOTCURRRAW: R3.1 R15.2 U2.2 | length 23.3
  Top Layer w0.381: R3.1 31.943,16.764 33.34,15.367 U2.2 35.814,15.367 36.449,16.002 36.449,21.336 42.865,21.336 43.627,20.574 R15.2
LEFTMOTOR+: J6.1 U8.3 U8.4 | length 7.2
  Top Layer w0.5: U8.4 51.308,9.779 J6.1
  Top Layer w1.27: U8.4 U8.3
LEFTMOTOR-: J6.2 U5.41 U10.3 | length 24.4
  Bottom Layer w1.27: J6.2 57.963,8.433 62.294,8.433 U5.41 67.78,13.919 70.815,13.919 U10.3
LEFTMOTOROUT: U5.42 U8.1 U8.2 U10.4 | length 42.7
  Top Layer w0.5: v1(49.962,15.621) 49.962,13.589 U8.1 U8.2
  Bottom Layer w1.27: v1(49.962,15.621) 58.25,15.621 U5.42 62.116,19.317 64.897,22.098 70.104,22.098 U10.4
LEFTPWM: J2.14 J3.5 U5.27 U7.5 U9.1 | length 38.3
  Top Layer w0.381: U7.5 52.578,53.594 v2(56.794,53.594) ; U9.1 57.023,28.829 57.023,32.512 U5.27
  Bottom Layer w0.381: J3.5 U7.5 ; v2(56.794,53.594) 56.794,42.647 J2.14 U5.27
NetC1_2: C1.2 R4.2 R5.2 U2.3 U2.5 | length 19.8
  Top Layer w0.381: C1.2 25.121,14.354 26.044,13.431 R5.2 27.305,14.097 ; R4.2 27.305,14.097 ; U2.5 37.084,12.827 35.814,14.097 U2.3 27.305,14.097
NetC2_1: C2.1 K1.2 R6.1 T1.2 T2.7 | length 79.5
  Top Layer w0.381: R6.1 8.89,61.468 12.192,61.468 ; C2.1 12.192,61.468 ; v2(16.579,61.468) T1.2 12.192,61.468 ; T2.7@23.368,65.084 24.638,65.084 v2(24.638,67.183) ; K1.2@55.472,83.733 K1.2@67.972,83.733
  Bottom Layer w0.381: v2(16.579,61.468) 18.923,61.468 v2(24.638,67.183) 30.505,67.183 32.842,69.52 32.842,77.064 39.512,83.733 K1.2@55.472,83.733
NetC6_1: C6.1 U6.6 | length 3.5
  Top Layer w0.381: U6.6 90.399,8.89 91.418,9.909 C6.1
NetC7_1: C7.1 U8.6 | length 4.3
  Top Layer w0.381: U8.6 58.674,11.049 C7.1
NetD1_1: D1.1 R2.1 | length 4.4
  Top Layer w0.381: D1.1 32.46,89.866 33.782,88.544 R2.1
NetD2_1: D2.1 R1.1 | length 3.1
  Top Layer w0.381: R1.1 D2.1
NetD3_A: D3.A U1.Vout | length 34.5
  Top Layer w0.508: v1(22.454,34.004) 29.975,41.526 D3.A
  Bottom Layer w0.508: U1.Vout 22.454,26.772 v1(22.454,34.004)
NetJ1_2: J1.2 U7.35 | length 9.9
  Bottom Layer w0.381: J1.2 45.832,72.532 45.832,72.367 46.609,71.59 46.609,65.405 U7.35
NetJ2_2: J2.2 U5.3 | length 5.1
  Bottom Layer w0.381: U5.3 J2.2
NetJ2_7: J2.7 U5.13 | length 5.1
  Bottom Layer w0.381: U5.13 J2.7
NetJ2_11: J2.11 U5.21 | length 5.1
  Bottom Layer w0.381: U5.21 J2.11
NetJ2_18: J2.18 U5.35 | length 5.1
  Bottom Layer w0.381: U5.35 J2.18
NetJ7_1: J7.1 U7.15 | length 3.8
  Top Layer w0.381: U7.15 J7.1
NetJ7_2: J7.2 U7.16 | length 3.8
  Top Layer w0.381: U7.16 J7.2
NetJ7_4: J7.4 U7.18 | length 3.8
  Top Layer w0.381: U7.18 J7.4
NetP1_1: P1.1 U3.2 | length 14.3
  Top Layer w1.27: P1.1 16.561,76.632 17.958,76.632 U3.2
NetP3_1: P3.1 P3.5 T2.5 | length 11.4
  Top Layer w0.381: T2.5@25.908,65.084 27.178,65.084 27.178,69.088 P3.5 P3.1
NetP3_2: P3.2 R16.1 | length 25.4
  Top Layer w0.381: P3.2 30.556,75.006 32.664,75.006 35.027,72.644 35.027,71.056 35.814,70.269 37.719,70.269 39.014,71.564 39.014,79.629 39.776,80.391 40.645,80.391 R16.1
NetP3_4: P3.4 R17.1 | length 47.8
  Top Layer w0.381: P3.4 22.606,67.056 22.606,63.754 23.419,62.941 31.369,62.941 33.299,61.011 35.179,61.011 39.599,65.43 44.044,65.43 44.044,67.48 41.529,69.995 41.529,71.755 40.645,72.639 R17.1
NetR6_2: R6.2 T1.1 U3.1 | length 34.7
  Top Layer w0.6: 11.557,64.516 13.021,64.516 T1.1@13.783,65.278
  Top Layer w1.27: R6.2 11.201,64.257 11.45,64.008 T1.1@13.783,64.008 ; 11.557,64.516 11.557,76.149 13.589,78.181 15.697,78.181 U3.1 ; T1.1@13.783,62.738 T1.1@13.783,64.008 ; T1.1@13.783,65.278 T1.1@13.783,64.008
NetR13_1: R13.1 U6.7 | length 71.3
  Top Layer w0.381: R13.1 v2(46.711,14.097) ; v2(59.309,19.304) 71.933,19.304 71.958,19.279 72.746,20.066 78.816,20.066 81.61,22.86 92.329,22.86 93.891,21.298 90.754,18.161 90.754,10.16 U6.7
  Bottom Layer w0.381: v2(46.711,14.097) 46.711,19.66 48.222,21.171 57.569,21.171 v2@59.372,19.367
NetR15_1: R15.1 U8.7 | length 15.6
  Top Layer w0.381: R15.1 48.222,18.796 48.793,18.224 53.073,18.224 54.432,16.866 54.432,12.319 U8.7
NetU9_2: U9.2 U10.16 | length 14.1
  Top Layer w0.381: U9.2 57.125,27.559 58.268,28.702 58.268,29.439 59.842,31.013 64.084,31.013 66.015,29.083 U10.16
NetU9_4: U9.4 U10.14 | length 21.7
  Top Layer w0.381: U9.4 58.039,25.019 59.55,26.53 59.55,28.842 60.452,29.743 63.322,29.743 65.862,27.204 71.4,27.204 U10.14
NetU9_6: U9.6 U10.10 | length 30.9
  Top Layer w0.381: U9.6 57.531,22.479 v2(59.436,24.384) ; v2(72.568,22.708) 77.064,22.708 U10.10
  Bottom Layer w0.381: v2(59.436,24.384) 70.891,24.384 v2(72.568,22.708)
NetU9_8: U9.8 U10.12 | length 19.5
  Top Layer w0.381: U9.8 66.123,21.209 69.151,24.237 73.513,24.237 U10.12
PWM1: J3.7 P7.2 U7.7 | length 96.9
  Top Layer w0.381: v2(24.536,33.045) 32.004,40.513 37.795,40.513 40.126,42.844 46.968,42.844 47,42.812 58.361,42.812 59.44,43.89 61.162,43.89 61.824,44.552 61.824,48.869 56.743,48.869 J3.7
  Bottom Layer w0.381: v2(24.536,33.045) 24.536,7.569 29.515,2.591 34.976,2.591 P7.2 ; J3.7 U7.7
PWM2: J3.11 P7.7 U7.11 | length 75.3
  Top Layer w0.381: P7.7 37.668,7.823 v2(42.901,7.823) ; v2(46.584,50.19) 64.414,50.19 U7.11
  Bottom Layer w0.381: v2(42.901,7.823) 41.844,8.88 41.844,18.055 42.901,19.112 42.901,43.409 46.584,47.092 v2(46.584,50.19) ; J3.11 U7.11
PWM3: J3.12 P7.6 U7.12 | length 105.3
  Top Layer w0.381: v2(21.971,47.879) 22.123,47.879 24.663,50.419 37.719,50.419 39.014,51.714 39.014,52.68 42.647,52.68 44.958,54.991 64.643,54.991 U7.12
  Bottom Layer w0.381: v2(21.971,47.879) 25.431,44.419 25.431,19.121 30.455,14.097 33.706,14.097 33.706,11.633 P7.6 ; J3.12 U7.12
PWRIR: J9.4 R14.2 T2.4 U7.48 | length 52.8
  Top Layer w0.381: T2.4 27.178,58.975 30.48,58.975 R14.2 37.617,57.973 41.189,61.544 53.594,61.544 54.889,62.84 61.874,62.84 U7.48
  Bottom Layer w0.381: U7.48 64.364,62.84 64.364,71.78 J9.4
PWRROBOT: J9.3 R8.2 T2.2 U7.49 | length 56.2
  Top Layer w0.381: T2.2 24.638,57.973 R8.2 24.577,55.093 24.882,54.788 27.305,54.788 27.534,55.016 29.235,55.016 29.286,54.966 38.075,54.966 40.437,57.328 42.418,57.328 45.415,60.325 59.309,60.325 U7.49
  Bottom Layer w0.381: U7.49 61.824,62.84 61.824,71.78 J9.3
RIGHTDIR: J2.6 J3.14 U5.11 U7.14 U9.9 U10.11 | length 52.3
  Top Layer w0.381: U9.9 60.985,22.479 60.985,20.396 66.208,20.396 69.414,23.602 75.418,23.602 U10.11 ; J3.14 79.756,41.148 J2.6
  Bottom Layer w0.381: J3.14 U7.14 ; J2.6 U5.11 80.899,33.782 U10.11
RIGHTENCA: J4.5 J5.5 U7.29 | length 110.4
  Top Layer w0.381: U7.29 51.664,65.43 60.604,65.43 63.144,62.89 81.28,62.89 v2(81.483,62.687)
  Bottom Layer w0.381: U7.29 J4.5 ; J5.5 76.581,3.043 85.446,3.043 85.446,10.312 82.144,13.614 82.144,26.035 79.654,28.524 79.654,32.563 78.486,33.731 78.486,42.697 81.483,45.695 v2(81.483,62.687)
RIGHTENCB: J4.6 J5.6 U7.28 | length 99.3
  Bottom Layer w0.381: J4.6 U7.28 54.204,65.43 54.204,62.738 51.714,60.249 51.714,46.914 50.521,45.72 50.521,32.436 47.015,28.931 47.015,24.384 49.593,21.806 63.078,21.806 64.45,23.177 70.551,23.177 71.923,21.806 74.562,21.806 77.064,19.304 77.064,15.367 74.371,12.675 74.371,4.287 J5.6
RIGHTFB: J2.1 U5.1 | length 5.1
  Bottom Layer w0.381: U5.1 J2.1
RIGHTMOTCURR: J1.4 R7.2 U2.7 U7.37 | length 72.9
  Top Layer w0.381: R7.2 39.685,18.832 37.719,16.866 37.719,16.002 38.354,15.367 U2.7 42.474,15.367 v2(43.567,16.459)
  Bottom Layer w0.381: v2(43.567,16.459) 44.577,17.47 44.577,35.288 47.973,38.684 47.973,40.48 49.174,41.681 49.174,60.35 U7.37 51.714,65.38 51.714,71.73 J1.4
RIGHTMOTCURRRAW: R7.1 R13.2 U2.6 | length 12.6
  Top Layer w0.381: R7.1 37.785,18.735 37.084,18.034 37.084,14.376 37.363,14.097 U2.6 R13.2
RIGHTMOTOR+: J5.1 U6.3 U6.4 | length 8.1
  Top Layer w0.5: U6.4 84.43,7.62 U6.3@84.43,8.89 ; U6.3 84.408,8.404 84.43,8.382
  Top Layer w1: 84.43,8.382 84.938,8.382 85.192,8.128
  Top Layer w1.27: 85.192,8.128 86.487,8.128 ; J5.1 86.741,8.382
RIGHTMOTOR-: J5.2 U5.37 U10.6 | length 14.5
  Bottom Layer w1.27: U10.6 80.899,13.038 U5.37 84.201,7.17 J5.2
RIGHTMOTOROUT: U5.38 U6.1 U6.2 U10.5 | length 15.9
  Top Layer w1.27: U5.38 78.346,9.525 80.569,9.525 82.474,11.43 83.566,11.43 84.408,10.588
  Bottom Layer w1.27: U5.38 76.116,12.743 78.359,14.986 U10.5
RIGHTPWM: J2.5 J3.6 U5.9 U7.6 U9.5 | length 88
  Top Layer w0.381: J3.6 54.838,49.504 73.889,49.504 79.757,43.637 79.757,42.544 J2.5 ; U9.5 55.499,23.749 53.061,26.187 53.061,36.17 81.051,36.17 U5.9
  Bottom Layer w0.381: J3.6 U7.6 ; U5.9 J2.5
RX: J3.2 P2.1 U7.2 | length 58
  Top Layer w0.381: P2.1 5.639,27.889 5.639,30.114 10.245,34.72 16.432,34.72 19.458,37.746 19.458,43.933 24.064,48.539 v2(35.052,48.539)
  Bottom Layer w0.381: v2(35.052,48.539) 35.306,48.539 37.719,46.126 41.3,46.126 J3.2 U7.2
RX3: J3.9 P6.2 U7.9 | length 91.6
  Top Layer w0.381: P6.2 19.101,2.591 16.764,2.591 16.002,3.353 16.002,14.935 23.8,22.733 48.831,22.733 50.698,24.6 51.371,23.927 v2(52.045,23.927) ; v2(53.086,45.847) 53.289,45.847 53.797,46.355 59.309,46.355 J3.9
  Bottom Layer w0.381: v2(52.045,23.927) 53.086,24.968 v2(53.086,45.847) ; J3.9 U7.9
SCL: J4.11 P4.5 U7.23 | length 28.1
  Top Layer w0.381: J4.11 66.904,71.73 78.08,71.73 80.264,73.914 86.233,73.914 P4.5
  Bottom Layer w0.381: U7.23 J4.11
SDA: J4.10 P4.2 U7.24 | length 30.5
  Top Layer w0.381: J4.10 63.622,69.982 63.622,69.372 64.44,68.554 72.242,68.554 72.618,68.178 86.339,68.178 P4.2
  Bottom Layer w0.381: U7.24 J4.10
START: J3.8 K2.1 R12.1 U7.8 | length 68
  Top Layer w0.381: K2.1@72.109,88.733 84.609,88.733 87.81,85.532 R12.1
  Bottom Layer w0.381: J3.8 U7.8 58.039,56.871 56.794,58.115 56.794,60.325 58.674,60.325 59.334,60.985 59.334,73.914 60.604,75.184 61.773,75.184 70.663,84.074 70.663,87.287 K2.1@72.109,88.733
TX: J3.3 P2.5 U7.3 | length 42.2
  Top Layer w0.381: P2.5 28.702,43.18 38.481,43.18 40.64,45.339 43.053,45.339 J3.3
  Bottom Layer w0.381: J3.3 U7.3
TX3: J3.10 P6.5 U7.10 | length 103.8
  Top Layer w0.381: v2(22.25,24.994) 22.682,25.425 31.293,25.425 37.77,31.902 37.77,37.719 41.478,41.427 60.63,41.427 60.731,41.326 60.731,38.761 63.271,38.761 63.271,41.25 69.799,41.25 71.984,43.434 71.984,48.869 64.363,48.869 J3.10
  Bottom Layer w0.381: P6.5 22.25,8.28 v2(22.25,24.994) ; J3.10 U7.10
VBATT: J4.4 R9.1 R10.2 U7.30 | length 64.6
  Top Layer w0.381: v2(23.937,54.188) R9.1 R10.2
  Bottom Layer w0.381: v2(23.937,54.188) 25.114,54.188 28.292,57.366 28.292,58.544 33.706,63.957 33.706,74.778 36.449,77.521 51.26,77.521 52.133,76.647 52.133,75.654 51.054,74.574 47.244,74.574 46.609,73.939 46.609,72.535 47.879,71.265 J4.4 U7.30
VMOT: P7.5 P8.6 R2.2 R9.2 T1.3 U1.Vin U5.39 U10.7 | length 211.1
  Top Layer w0.6: 18.974,59.868 18.974,61.468 18.983,61.468 20.513,61.468 21.717,60.264 ; 18.974,68.857 18.974,65.278 T1.3@18.983,65.278
  Top Layer w1.27: U1.Vin 21.057,30.455 25.248,30.455 27.178,32.385 P8.6 ; 18.974,59.868 v1(21.692,57.15) ; 18.974,68.857 33.782,83.665 R2.2 ; T1.3@18.983,61.468 18.983,62.738 18.983,64.008 T1.3@18.983,65.278 ; 21.717,60.264 21.717,52.771 R9.2 ; P7.5 45.618,2.261 v1(46.914,2.261)
  Bottom Layer w1.27: v1(21.692,57.15) 21.692,50.052 28.575,43.169 P8.6 27.838,31.648 26.772,31.648 26.772,21.982 32.024,16.73 33.527,16.73 34.95,15.306 34.95,12.929 P7.5 ; v1(46.914,2.261) 48.082,1.092 63.805,1.092 66.271,3.558 66.271,5.257 66.982,5.969 70.874,5.969 72.462,7.556 ; U5.39 73.152,11.219 73.152,8.247 72.462,7.556 ; U10.7 88.443,11.379 88.443,2.794 87.612,1.963 73.373,1.963 72.136,3.2 72.136,7.231 72.462,7.556
VUSB: D4.A J1.1 U7.34 | length 30.3
  Top Layer w0.508: D4.A v1(40.97,55.832)
  Bottom Layer w0.508: v1(40.97,55.832) 40.97,62.306 U7.34 40.259,64.135 38.938,65.456 38.938,71.704 40.259,73.025 J1.1
pads on no net: J8.8 J9.8 P2.6 P2.7 P4.3 P4.4 P6.4 P8.3 P8.4 U1.EN U1.PG U3.0 U3.3 U5.6 U5.8 U5.14 U5.16 U5.18 U5.24 U5.26 U9.10 U9.11 U9.12 U9.13

## Polygon pours and split planes (outlines as drawn)
GND on Bottom Layer "Bottom Layer-GND" (solid, pour order 6): 6.35,0 95.25,0 ccw(c95.25,2.54) 97.79,2.54 97.79,22.86 97.79,95.25 ccw(c95.25,95.25) 95.25,97.79 53.467,97.79 2.54,97.79 ccw(c2.54,95.25) 0,95.25 0,76.581 0,2.54 ccw(c2.54,2.54) 2.54,0 4.699,0
GND on Top Layer "Top Layer-GND" (solid, pour order 10): 20.701,0 95.25,0 ccw(c95.25,2.54) 97.79,2.54 97.79,56.261 97.79,95.25 ccw(c95.25,95.25) 95.25,97.79 51.181,97.79 2.54,97.79 ccw(c2.54,95.25) 0,95.25 0,70.866 0,2.54 ccw(c2.54,2.54) 2.54,0 11.303,0

## Keep-outs
Keep-Out Layer:
  lines w0.152: 0,2.223 ccw(c2.223,2.223) 2.223,0 95.567,0 ccw(c95.567,2.223) 97.79,2.223 97.79,95.568 ccw(c95.567,95.567) 95.567,97.79 2.223,97.79 ccw(c2.223,95.567) 0,95.567 0,2.223

## Other copper
Top Layer:
  pour cut-out: 3.429,49.657 18.034,49.657 18.161,49.53 18.161,38.481 3.576,38.481
Bottom Layer:
  pour cut-out: 3.302,49.784 3.338,49.82 17.907,49.82 17.907,38.608 3.302,38.608

## Silkscreen, mask and mechanical layers (free items; w line width, h text height)
Top Overlay:
  text "+" at 10.287,75.565 h3 r90
  text "-" at 10.16,68.199 h3 r90
  text "RegBot" at 4.826,51.943 h4 r90
  text "V 3.3" at 8.636,51.562 h2 r90
  text "R" at 48.006,3.429 h2
  text "W" at 66.167,3.429 h2
  text "W" at 70.866,3.429 h2
  text "R" at 88.773,3.302 h2
Mechanical 16:
  drawing of 1874 lines, arcs and shapes, not listed
  text "1" at -61.925,127.635 h1.78
  text "2" at 10.719,127.635 h1.78
  text "3" at 83.871,127.635 h1.78
  text "4" at 156.769,127.635 h1.78
  text "A" at -96.266,104.623 h1.78
  text "A" at 190.754,104.623 h1.78
  text "B" at -96.266,56.566 h1.78
  text "C" at -96.266,8.052 h1.78
  text "C" at 190.754,8.052 h1.78
  text "ENGINEER:" at 75.819,-28.956 h1.14
  text "TITLE:" at 113.919,-28.956 h1.14
  text "PCB DESIGNER:" at 75.819,-36.449 h1.14
  text "D" at -96.266,-39.954 h1.78
  text "D" at 190.754,-39.954 h1.78
  text "DATE:" at 75.819,-44.196 h1.14
  text "PART NO.:" at 113.919,-44.196 h1.14
  text "REV:" at 167.259,-44.196 h1.14
  text "Altium Limited" at 42.799,-46.736 h1.78
  text ".PRINT_DATE" at 77.089,-47.244 h1.78
  text "12a Rodborough Rd" at 42.799,-49.276 h1.78
  text "Frenchs Forest" at 42.799,-51.816 h1.78
  text "FILE NAME:" at 75.819,-51.816 h1.14
  text "DWG NO:" at 113.919,-51.816 h1.14
  text "SCALE:" at 167.259,-51.816 h1.14
  text "NSW 2086" at 42.799,-54.356 h1.78
  text ".PCB_FILE_NAME_NO_PATH" at 77.089,-54.864 h1.78
  text "1" at -61.925,-60.325 h1.78
  text "2" at 10.719,-60.325 h1.78
  text "3" at 83.871,-60.325 h1.78
  text "4" at 156.769,-60.325 h1.78

## Text inside footprints (layer, text, board x,y; h text height)
U2: Mechanical 16 "*" at 33.884,17.069 h1.97; Top Overlay "*" at 33.884,17.069 h1.97